# EAGLE board OSDeck (EAGLE 9.7.0)
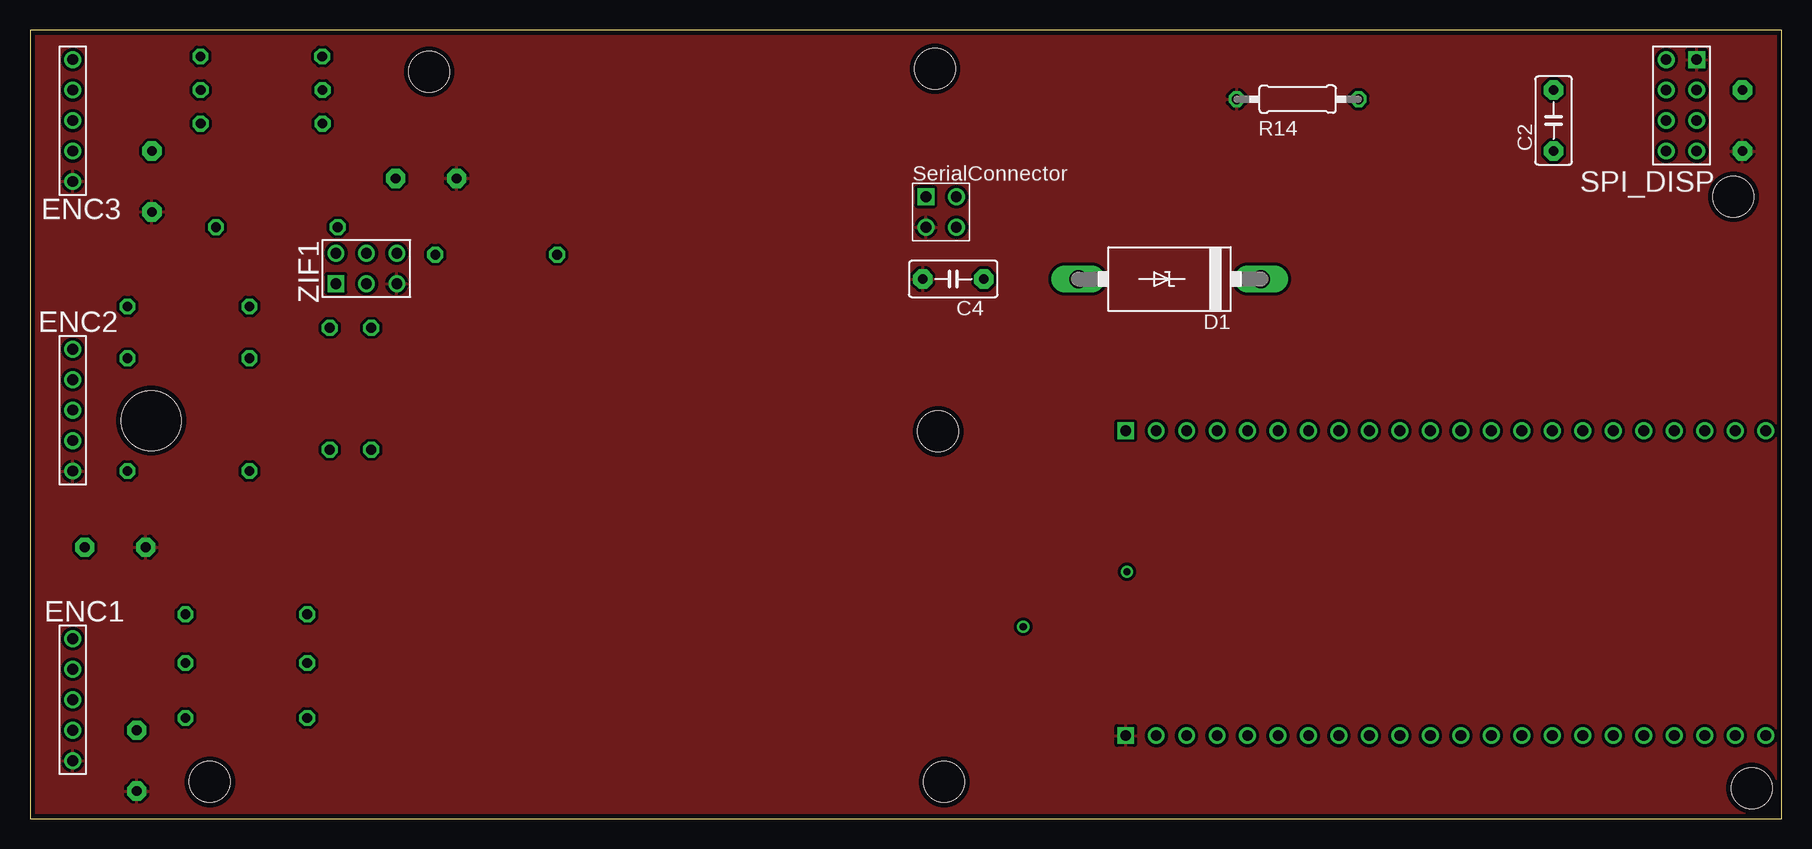
[diagram p0: board, top side]
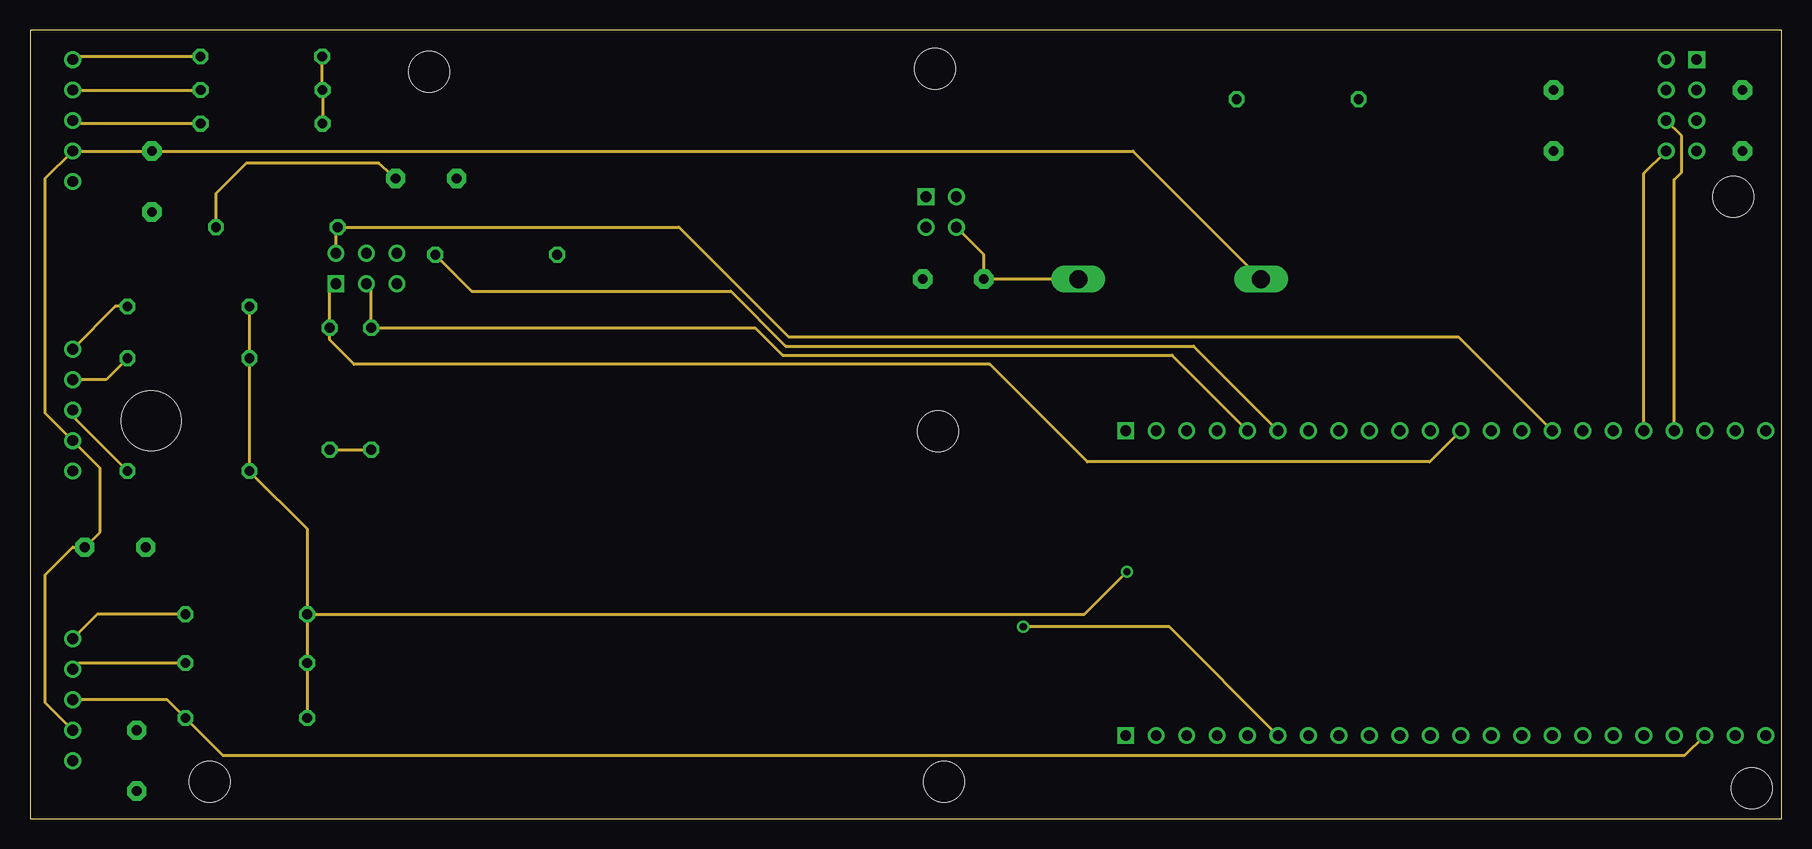
[diagram p1: board, inner layer Route2]
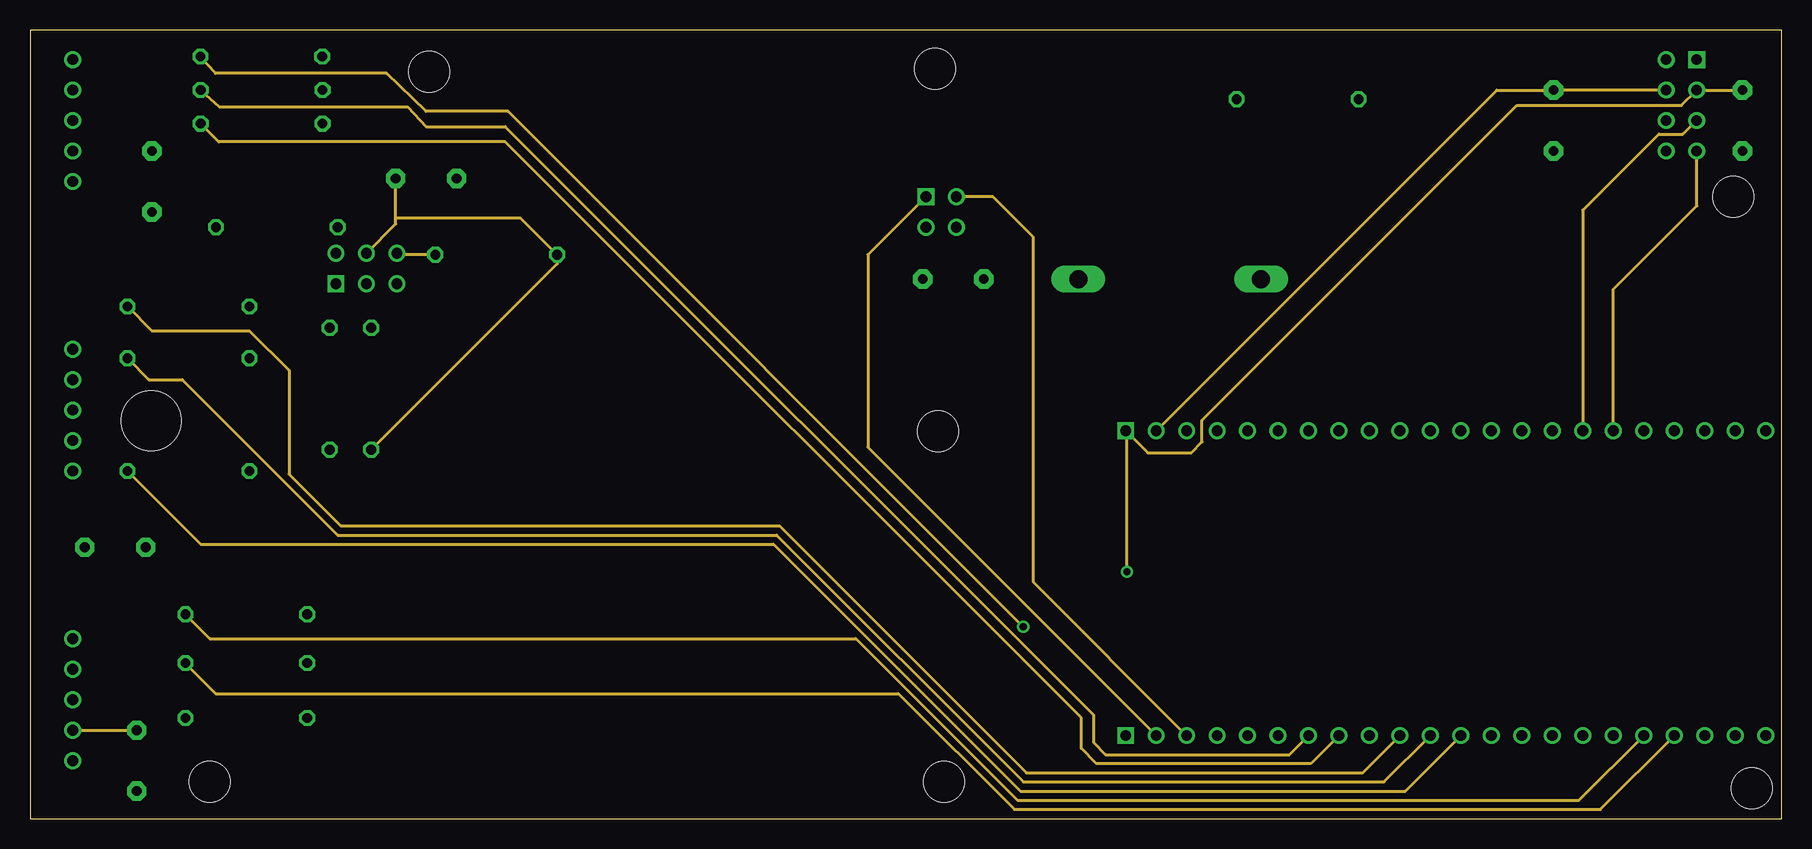
[diagram p2: board, inner layer Route15]
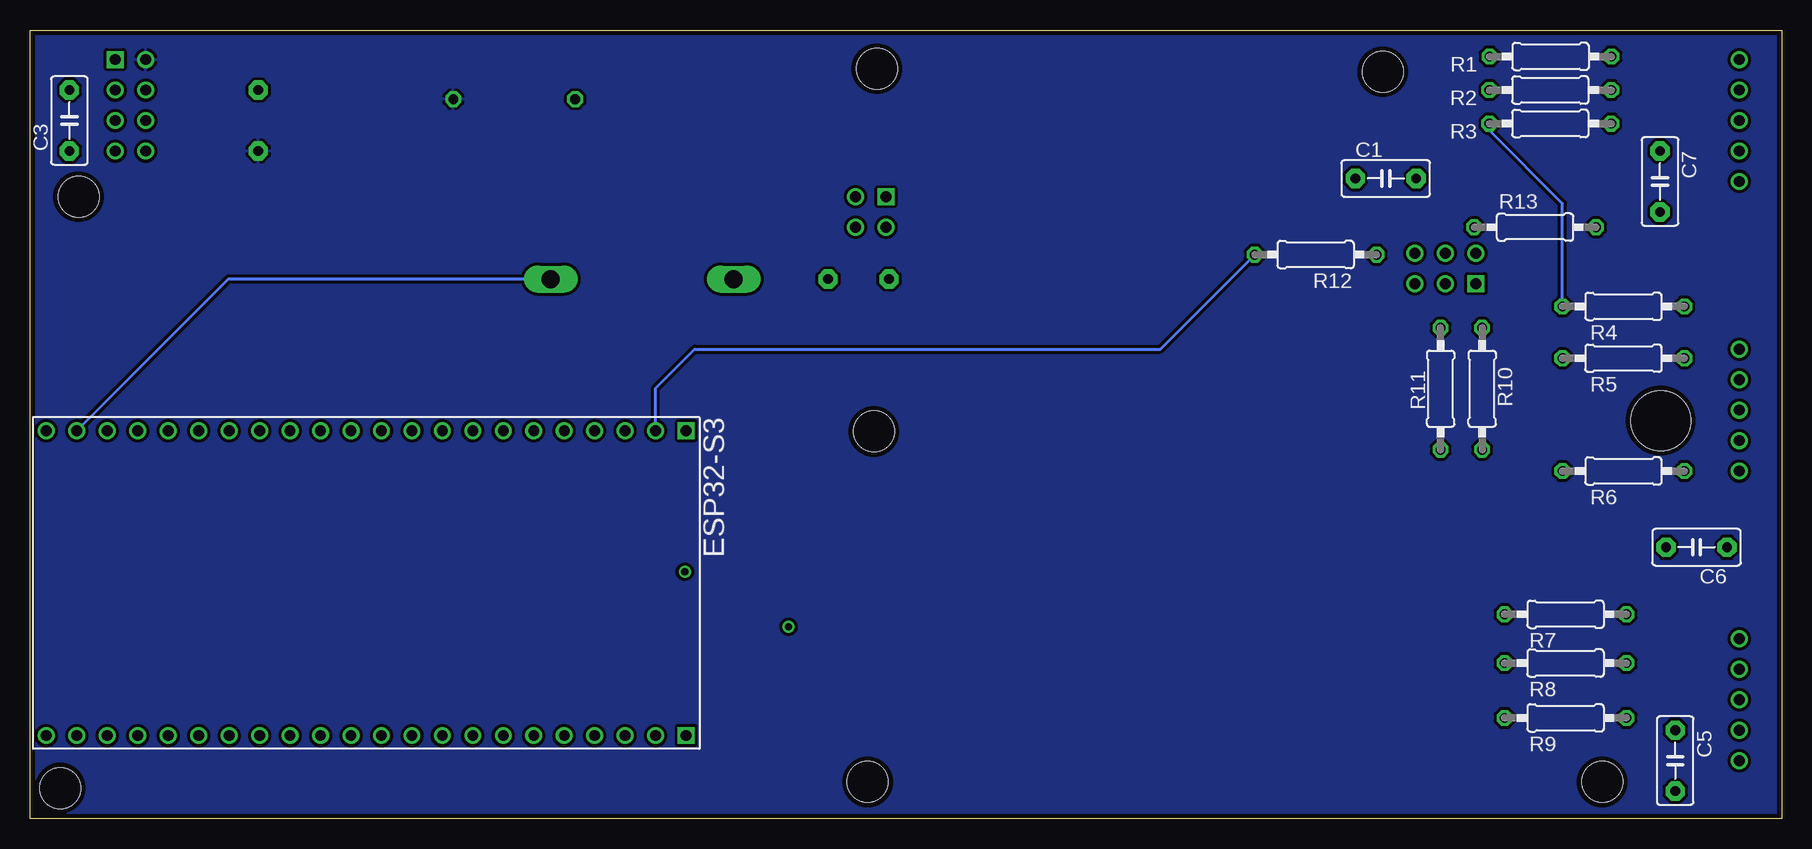
[diagram p3: board, bottom side, seen from below]

Size 146.03 x 65.71 mm. Coordinates in mm from the lower left corner, seen from the top.
Outline: 0,65.71 0,0 146.03,0 146.03,65.71 0,65.71
Copper layers (1+2*15+16): Top 0.035mm / dielectric 1.5mm / Route2 0.035mm / dielectric 0.15mm / Route15 0.035mm / dielectric 0.2mm / Bottom 0.035mm
Design rules "Fusion Electronics Design Rules": minimum track width 10mil, minimum drill 0.3mm, track to track 10mil, track to pad 0.15mm, pad to pad 0.5mm, via to via 10mil, smd to smd 6mil, copper to edge 0.4mm, drill to drill 6mil, minimum pad ring 10mil, minimum via ring 8mil, stop-mask expansion 4mil, vias tented up to drill 0mil, thermal gap 10mil
Holes 3.4 mm at 143.51,2.54 141.99,51.82 76.2,3.05 75.44,62.48 75.69,32.26 14.99,3.05 33.27,62.23
Holes 5 mm at 10.1,33.15

## Footprints (pad centres in the part's own frame; a part is rotated, then mirrored left to right if it is on the bottom)
C5B3 = drill 0.813 pad 1.6 octagon: 1 -2.54,0; 2 2.54,0
C4111-15 = drill 1.499 long: A 7.62,0; C -7.62,0
HW040 = drill 0.9: CLK 0,5.08; DT 0,2.54; GND 0,-5.08; SW 0,0; VCC 0,-2.54
0207/10 = drill 0.813 octagon: 1 -5.08,0; 2 5.08,0
4_WIRE_SPI_DISPLAY = drill 0.9 square: GND -2.54,3.81 | drill 0.9: GND1 -5.08,3.81; SCLK -5.08,-3.81; SCS -2.54,-1.27; SDI -2.54,-3.81; SDO -5.08,-1.27; VCC -2.54,1.27; VCC1 -5.08,1.27
44-PIN_ESP32_S3 = drill 0.9: 0 20.32,2.54; 1 20.32,27.94; 2 20.32,25.4; 3 -5.08,5.08; 3V3-2 -5.08,33.02; 4 -5.08,27.94; 5 -5.08,25.4; 5VIN -5.08,-15.24; 6 -5.08,22.86; 7 -5.08,20.32; 8 -5.08,7.62; 9 -5.08,0; 10 -5.08,-2.54; 11 -5.08,-5.08; 12 -5.08,-7.62; 13 -5.08,-10.16; 14 -5.08,-12.7; 15 -5.08,17.78; 16 -5.08,15.24; 17 -5.08,12.7; 18 -5.08,10.16; 19 20.32,-12.7; 20 20.32,-10.16; 21 20.32,-7.62; 35 20.32,5.08; 36 20.32,7.62; 37 20.32,10.16; 38 20.32,12.7; 39 20.32,15.24; 40 20.32,17.78; 41 20.32,20.32; 42 20.32,22.86; 45 20.32,0; 46 -5.08,2.54; 47 20.32,-5.08; 48 20.32,-2.54; GND2 -5.08,-17.78; GND3 20.32,-15.24; GND4 20.32,-17.78; RST -5.08,30.48; RX 20.32,30.48; TX 20.32,33.02 | drill 0.9 square: 3V3-1 -5.08,35.56; GND 20.32,35.56
SERIALCONNECTOR = drill 0.9: 5VIN 1.27,-1.27; GND -1.27,-1.27; RX 1.27,1.27 | drill 0.9 square: TX -1.27,1.27
ZIF_6PIN_05MM_254MM = drill 0.9: GND -6.35,-1.27; INT -3.81,-1.27; SCL -3.81,3.81; VCC -3.81,1.27; WAKE -6.35,1.27 | drill 0.9 square: SDA -6.35,3.81

## Placement (x,y rotation side)
C1  0.1µF  [C5B3]  33.02,53.34 0 bottom
C2  0.1µF  [C5B3]  127,58.17 90 top
C3  0.1µF  [C5B3]  142.75,58.17 90 bottom
C4  0.1µF  [C5B3]  76.96,44.96 180 top
C5  0.1µF  [C5B3]  8.89,4.83 270 bottom
C6  0.1µF  [C5B3]  7.11,22.61 180 bottom
C7  0.1µF  [C5B3]  10.16,53.09 270 bottom
D1  1N5908  [C4111-15]  95,44.96 180 top
ENC1  HW040  [HW040]  3.56,9.91 0 top
ENC2  HW040  [HW040]  3.56,34.04 0 top
ENC3  HW040  [HW040]  3.56,58.17 0 top
R1  4.7 kΩ  [0207/10]  19.28,63.5 180 bottom
R2  4.7 kΩ  [0207/10]  19.3,60.71 180 bottom
R3  4.7 kΩ  [0207/10]  19.3,57.91 180 bottom
R4  4.7 kΩ  [0207/10]  13.21,42.67 180 bottom
R5  4.7 kΩ  [0207/10]  13.21,38.35 180 bottom
R6  4.7 kΩ  [0207/10]  13.21,28.96 180 bottom
R7  4.7 kΩ  [0207/10]  18.03,17.02 180 bottom
R8  4.7 kΩ  [0207/10]  18.03,12.95 180 bottom
R9  4.7 kΩ  [0207/10]  18.03,8.38 180 bottom
R10  4.7 kΩ  [0207/10]  24.99,35.81 270 bottom
R11  4.7 kΩ  [0207/10]  28.45,35.81 270 bottom
R12  4.7 kΩ  [0207/10]  38.86,46.99 180 bottom
R13  4.7 kΩ  [0207/10]  20.57,49.28 0 bottom
R14  0 Ω  [0207/10]  105.66,59.94 0 top
SPI_DISP  4_WIRE_SPI_DISPLAY  [4_WIRE_SPI_DISPLAY]  141.46,59.44 0 top
U$1  44-PIN_ESP32_S3  [44-PIN_ESP32_S3]  126.9,27.24 270 bottom
U$7  SERIAL_CONNECTOR  [SERIALCONNECTOR]  75.95,50.55 0 top
ZIF1  ZIF_6PIN_05MM_254MM  [ZIF_6PIN_05MM_254MM]  29.31,50.92 90 top

## Library data of the parts
C1-C7 = capacitor-wima
D1 = diode
ENC1-ENC3 = HW404
R1-R14 = resistor
SPI_DISP = 4_Wire_SPI_Display
U$1 = 44-Pin_ESP32_S3
U$7 = SerialConnector
ZIF1 = ZIF_6PIN_05MM_254MM

## Nets
N$1: SPI_DISP.SCLK U$1.12
N$2: SPI_DISP.SDO U$1.13
N$3: SPI_DISP.SDI U$1.11
N$4: SPI_DISP.SCS U$1.10
N$5: C4.1 D1.A U$7.5VIN
N$7: U$1.RX U$7.RX
N$8: C1.2 C2.2 R10.2 R11.2 R12.2 R13.2 SPI_DISP.VCC1 U$1.3V3-2 ZIF1.VCC
N$9: ENC3.SW R3.1 U$1.40
N$10 [GND]: C1.1 C3.1 C4.2 C5.2 C6.2 C7.2 ENC1.GND ENC2.GND ENC3.GND R14.1 SPI_DISP.GND U$1.GND U$7.GND ZIF1.GND
N$11: ENC2.CLK R4.1 U$1.38
N$12: ENC2.DT R5.1 U$1.37
N$13: ENC3.CLK R1.1 U$1.42
N$14: C5.1 C6.1 C7.1 D1.C ENC1.VCC ENC2.VCC ENC3.VCC U$1.5VIN
N$15: C3.2 R1.2 R2.2 R3.2 R4.2 R5.2 R6.2 R7.2 R8.2 R9.2 SPI_DISP.VCC U$1.3V3-1
N$16: ENC2.SW R6.1 U$1.36
N$17: ENC1.SW R9.1 U$1.19
N$18: ENC1.DT R8.1 U$1.20
N$19: ENC1.CLK R7.1 U$1.21
N$20: R10.1 U$1.8 ZIF1.SDA
N$21: R11.1 U$1.5 ZIF1.WAKE
N$22: R12.1 U$1.6 ZIF1.INT
N$23: R13.1 U$1.9 ZIF1.SCL
N$24: U$1.TX U$7.TX
N$25: C2.1 R14.2 SPI_DISP.GND1
N$26: ENC3.DT R2.1 U$1.41

## Tracks (layer width: path | path; a pad name or v marks a point on that pad's centre or on a via)
N$1
  Route2 0.254: U$1.12 134.51,53.76 SPI_DISP.SCLK
N$2
  Route2 0.254: U$1.13 137.06,53.23 137.67,53.85 137.67,56.88 SPI_DISP.SDO
N$3
  Route15 0.254: U$1.11 131.97,44.09 138.94,51.05 138.94,55.61 SPI_DISP.SDI
N$4
  Route15 0.254: U$1.10 129.44,50.7 135.77,57.03 137.76,57.03 138.9,58.17 SPI_DISP.SCS
N$5
  Route2 0.254: D1.A C4.1 79.5,46.99 U$7.5VIN
N$7
  Route15 0.254: U$7.RX 80.26,51.82 83.64,48.44 83.64,19.69 U$1.RX
N$8
  Route2 0.254: R10.2 R11.2 | R13.2 15.49,52.07 18.03,54.61 29.08,54.61 C1.2
  Route15 0.254: R11.2 43.94,46.23 R12.2 40.89,50.04 30.48,50.04 | ZIF1.VCC 30.48,49.55 30.48,50.04 | U$1.3V3-2 122.26,60.71 C2.2 SPI_DISP.VCC1 | 30.48,50.04 C1.2
  Bottom 0.254: U$1.3V3-2 93.88,35.87 90.63,39.12 51.82,39.12 R12.2
N$9
  Route2 0.254: R3.1 3.81,57.91 ENC3.SW
  Route15 0.254: R3.1 15.75,56.39 39.62,56.39 87.63,8.38 87.63,5.84 88.9,4.57 106.77,4.57 U$1.40
N$10
  pour Top (isolate 0.254): -0.94,-3.73 146.48,-3.73 146.48,68.5 -0.94,68.5
N$11
  Route2 0.254: R4.1 7.11,42.67 ENC2.CLK
  Route15 0.254: R4.1 10.16,40.64 18.29,40.64 21.59,37.34 21.59,28.7 25.91,24.38 62.48,24.38 83.06,3.81 111.09,3.81 U$1.38
N$12
  Route2 0.254: R5.1 6.35,36.58 ENC2.DT
  Route15 0.254: R5.1 9.91,36.58 12.7,36.58 25.65,23.62 62.23,23.62 82.8,3.05 112.87,3.05 U$1.37
N$13  (via drill 0.6)
  Route2 0.254: R1.1 3.81,63.5 ENC3.CLK | v82.79,15.99 94.96,15.99 U$1.42
  Route15 0.254: R1.1 15.47,62.1 29.72,62.1 33.02,58.93 39.85,58.93 v82.79,15.99
N$14
  Route2 0.254: ENC1.VCC 1.27,9.65 1.27,20.31 3.57,22.61 C6.1 5.84,23.88 5.84,29.21 ENC2.VCC 1.27,33.78 1.27,53.34 ENC3.VCC C7.1 91.95,55.63 D1.C
  Route15 0.254: ENC1.VCC C5.1
  Bottom 0.254: D1.C 129.5,44.96 U$1.5VIN
N$15  (via drill 0.6)
  Route2 0.254: R4.2 R5.2 R6.2 23.11,24.13 R7.2 | R7.2 R8.2 R9.2 | R3.2 R2.2 24.36,60.73 R1.2 | R7.2 87.88,17.02 v91.44,20.57
  Route15 0.254: v91.44,20.57 91.44,32.21 U$1.3V3-1 93.17,30.48 96.8,30.48 97.7,31.38 97.7,33.18 123.95,59.44 137.65,59.44 SPI_DISP.VCC C3.2
  Bottom 0.254: R3.2 24.38,57.35 18.29,51.25 R4.2
N$16
  Route2 0.254: R6.1 3.56,33.53 ENC2.SW
  Route15 0.254: U$1.36 114.64,2.29 82.55,2.29 61.98,22.86 14.22,22.86 R6.1
N$17
  Route2 0.254: ENC1.SW 11.43,9.91 R9.1 16.06,5.27 137.95,5.27 U$1.19
N$18
  Route2 0.254: R8.1 4.06,12.95 ENC1.DT
  Route15 0.254: R8.1 15.49,10.41 72.39,10.41 82.04,0.76 130.9,0.76 U$1.20
N$19
  Route2 0.254: R7.1 5.59,17.02 ENC1.CLK
  Route15 0.254: R7.1 14.99,14.99 68.83,14.99 82.3,1.52 129.12,1.52 U$1.21
N$20
  Route2 0.254: ZIF1.SDA 24.99,44.06 R10.1 24.99,39.88 27.02,37.85 80.01,37.85 88.14,29.72 116.68,29.72 U$1.8
N$21
  Route2 0.254: ZIF1.WAKE 28.45,44.17 R11.1 60.45,40.89 62.74,38.61 95.2,38.61 U$1.5
N$22
  Route2 0.254: R12.1 36.83,43.94 58.42,43.94 62.99,39.37 96.98,39.37 U$1.6
  Route15 0.254: R12.1 30.71,46.99 ZIF1.INT
N$23
  Route2 0.254: ZIF1.SCL 25.5,49.12 R13.1 54.1,49.28 63.25,40.13 119.08,40.13 U$1.9
N$24
  Route15 0.254: U$7.TX 69.85,46.99 69.85,30.94 U$1.TX
N$25
  pour Bottom (isolate 0.254): -0.94,-3.73 146.48,-3.73 146.48,68.5 -0.94,68.5
N$26
  Route2 0.254: ENC3.DT R2.1
  Route15 0.254: R2.1 15.78,59.31 31.48,59.31 33.02,57.66 39.62,57.66 88.65,8.64 88.65,6.35 89.66,5.33 104.99,5.33 U$1.41